# Altium PCB ECEN3730_brd2a_9-26-2024.PcbDoc
Units mil, origin at the board's own origin, x right, y up, seen from the top; angles counter-clockwise.
Board outline 3500 x 2000 mil, 2 copper layers (Top Layer, Bottom Layer), stack 61.756 mil thick; 22 components, 12 nets, 57 pads, 13 vias.
Unrouted connection lines stored in the file: 1.
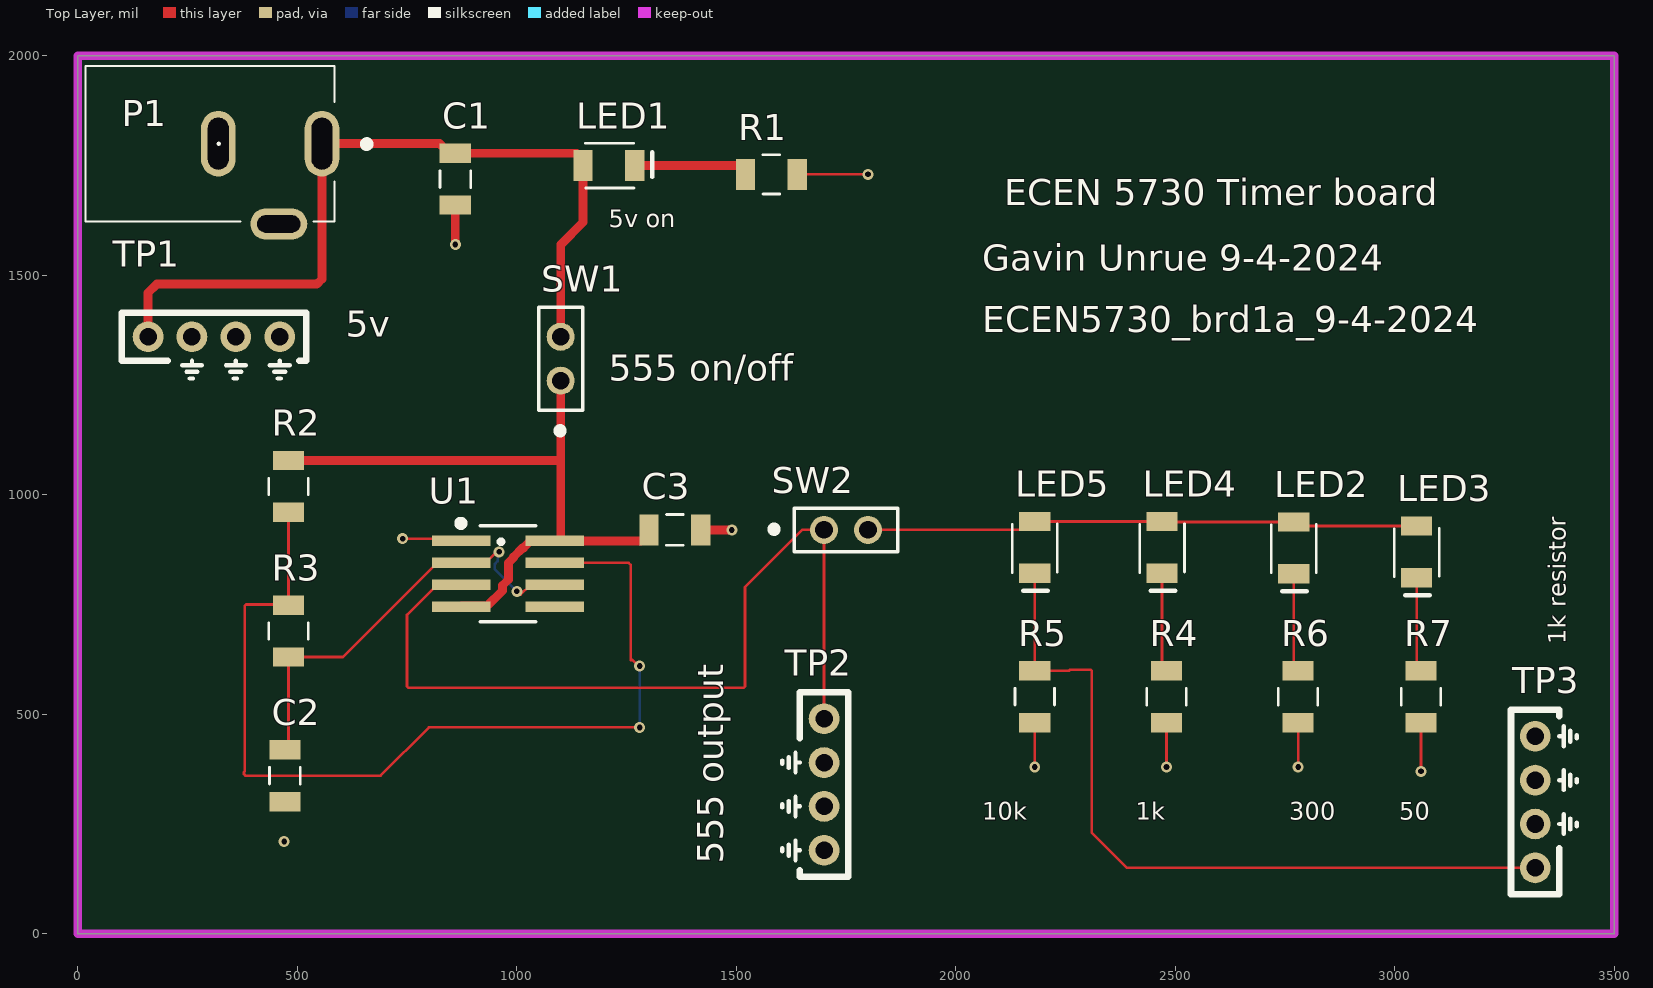
[diagram p0: Top Layer view]
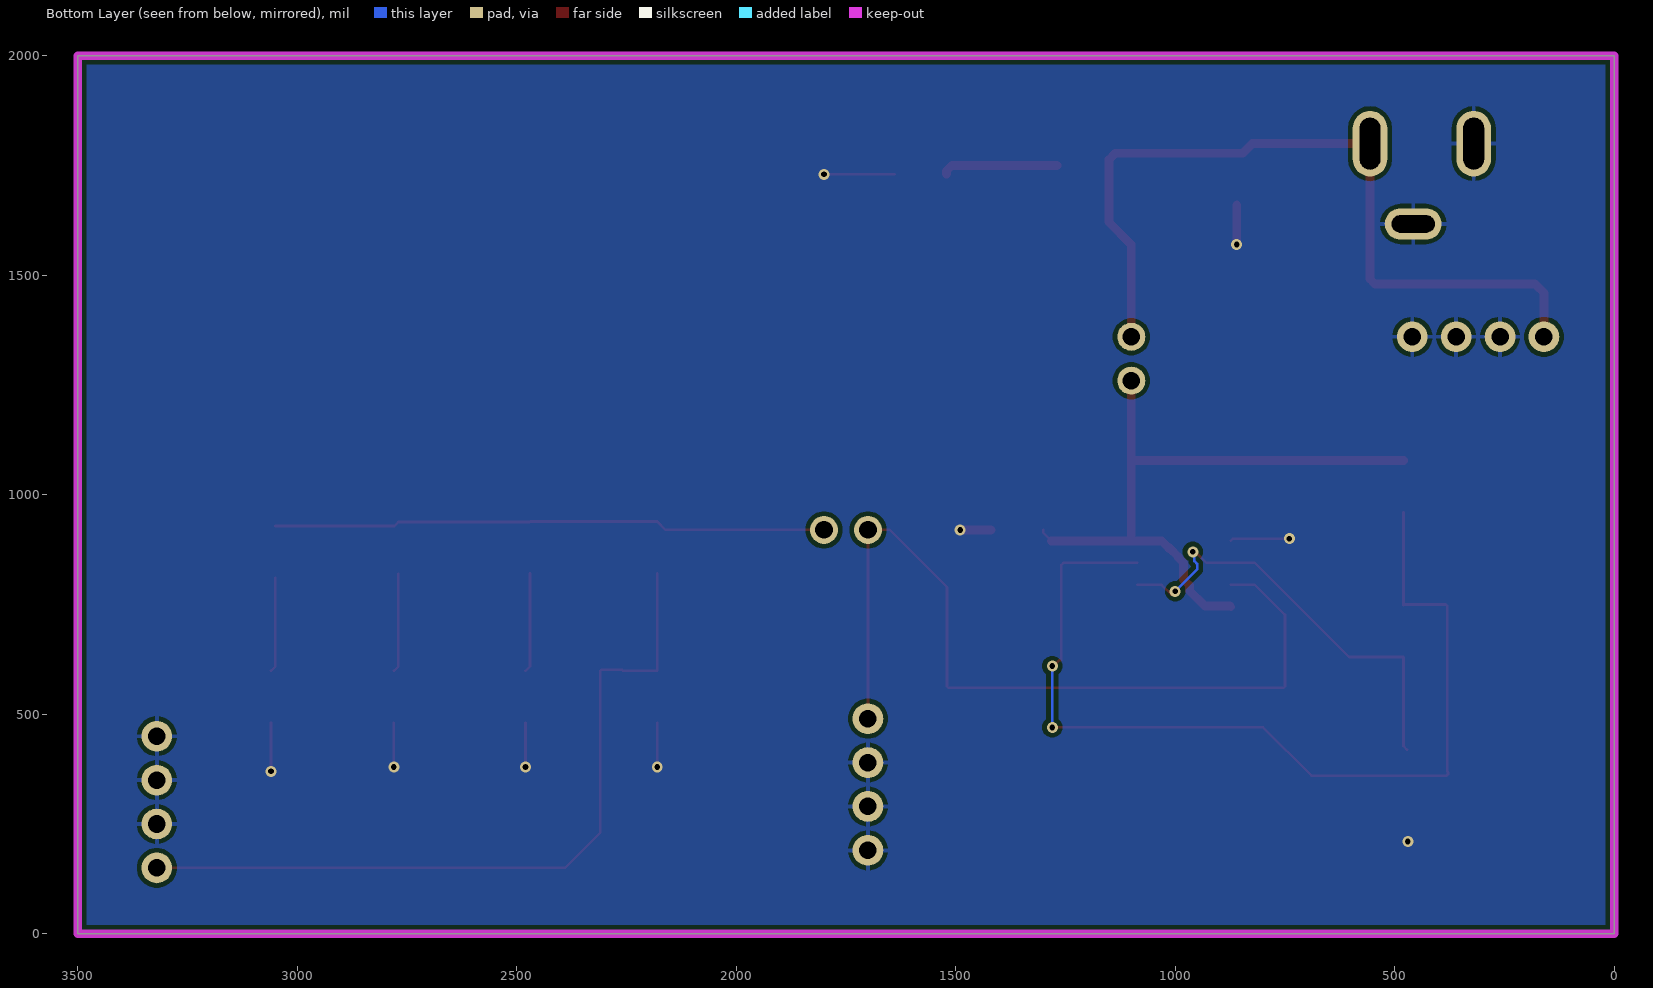
[diagram p1: Bottom Layer view, seen from below]
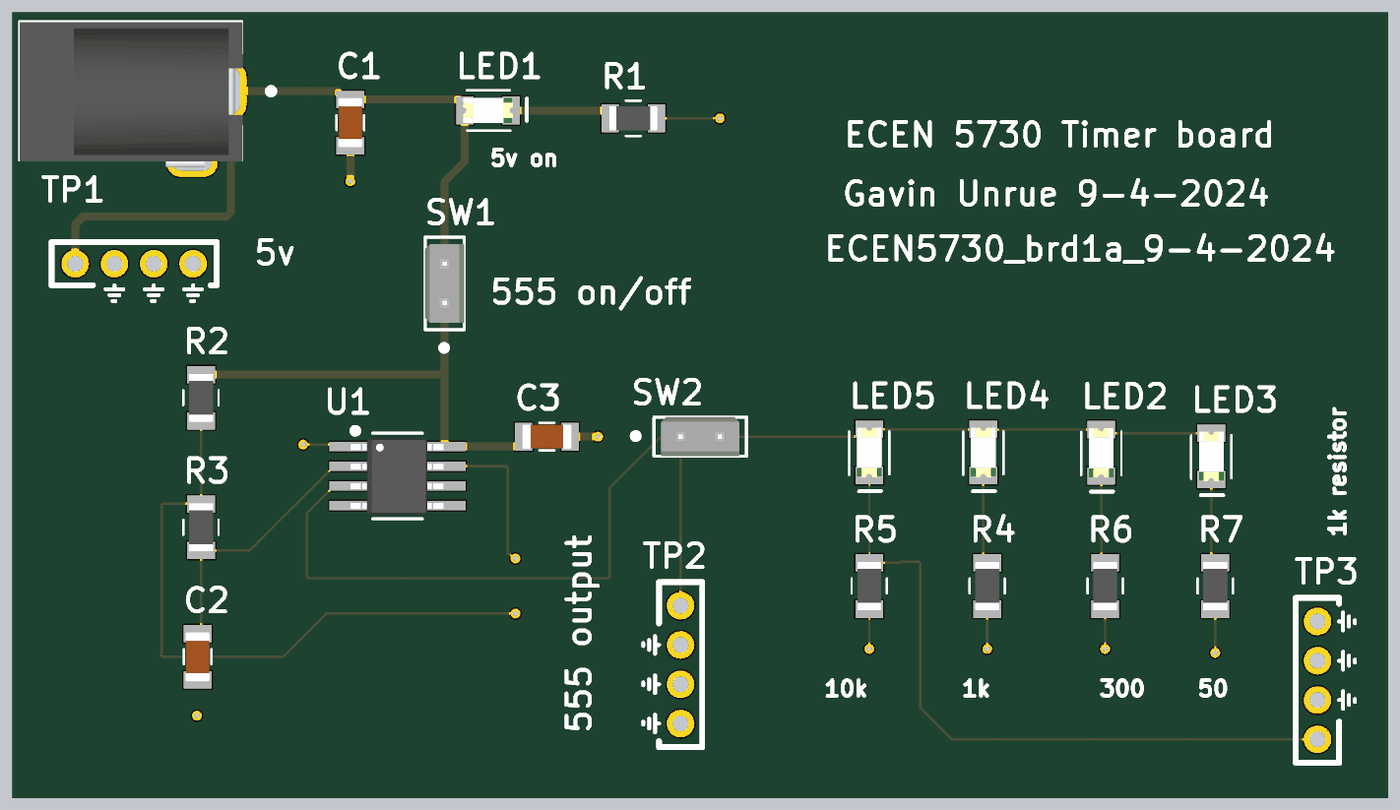
[diagram p2: 3D render of the assembled board from above, using the file's embedded part models]

## Layer stack, top to bottom
Top Solder: solder mask 1, SM-001, Dk 4
Top Layer: signal copper 1.378
Dielectric 1: core 59, Core-043, Dk 4.3
Bottom Layer: signal copper 1.378
Bottom Solder: solder mask 1, SM-001, Dk 4

## Board outline
0,0 3500,0 3500,2000 0,2000

## Design rules (kind name [scope] priority, off if disabled: settings)
BoardOutlineClearance [All] p1: gap=10 ignorepadtopadclearanceinfootprint=FALSE except(0: Arc-SplitContinuation Track-SplitContinuation SMDPad-SplitContinuation THPad-SplitContinuation Via-SplitContinuation Fill-SplitContinuation Poly-SplitContinuation Region-SplitContinuation Text-SplitContinuation)
Clearance clearance [All] p1: gap=10 ignorepadtopadclearanceinfootprint=FALSE
PlaneClearance [All] p1: clearance=10
PlaneConnect [All] p1: planeconnectstyle=Direct reliefexpansion=20 reliefentries=4 reliefconductorwidth=10 reliefairgap=10
PolygonConnect [All] p1: thpad.connectstyle=Relief thpad.reliefconductorwidth=10 thpad.reliefentries=4 thpad.polygonreliefangle="90 Angle" thpad.airgapwidth=10 smdpad.connectstyle=Direct smdpad.reliefconductorwidth=10 smdpad.reliefentries=4 smdpad.polygonreliefangle="90 Angle" smdpad.airgapwidth=10 via.connectstyle=Direct via.reliefconductorwidth=10 via.reliefentries=4 via.polygonreliefangle="90 Angle" via.airgapwidth=10
RoutingVias [All] p1: holewidth=13 width=25 viastyle="Through Hole" minholewidth=13 minwidth=25 maxholewidth=60 maxwidth=80
SolderMaskExpansion [All] p1: expansion=4 istentingtop=FALSE
UnRoutedNet [All] p1: checkbadconnections=TRUE
Width [All] p1: maxlimit=100 minlimit=6 preferedwidth=6 minimp=50.000000 maximp=50.000000 favimp=50.000000
27 further rules are at their usual default settings.

## Components (designator, comment, footprint, x,y, rotation, side; value= is the part's Value field where it differs from the comment)
C1 "22uF" 1206_Passive_Capacitor 860,1719 r90 top
C2 "1uF" 1206_Passive_Capacitor 471.62,360 r90 top
C3 "22uF" 1206_Passive_Capacitor 1360,920 r0 top
LED1 "Red" LED_1206 1210,1750 r0 top
LED2 "Red" LED_1206 2770,879 r270 top
LED3 "Red" LED_1206 3050,870 r270 top
LED4 "Red" LED_1206 2470,880 r270 top
LED5 "Red" LED_1206 2180,880 r270 top
P1 "Power Jack" Power_Jack 556.22,1800 r180 top value="CONN PWR JACK 2X5.5MM SOLDER"
R1 "1k" 1206_Passive_Resitor 1580,1730 r180 top value="1K Ohm"
R2 "1k" 1206_Passive_Resitor 480,1019 r90 top value="1K Ohm"
R3 "1k" 1206_Passive_Resitor 480,689.5 r90 top value="1K Ohm"
R4 "300 Ohm" 1206_Passive_Resitor 2480,540 r90 top value=300Ohm
R5 "1k" 1206_Passive_Resitor 2180,540 r90 top value="1K Ohm"
R6 "100M" 1206_Passive_Resitor 2780,540 r90 top value="50 Ohm"
R7 "" 1206_Passive_Resitor 3060,540 r90 top value="10K Ohm"
SW1 "555_off/on_switch" 2Pin-Header-Conn 1100,1260 r90 top
SW2 "led_on_off_sw" 2Pin-Header-Conn 1700,920 r0 top
TP1 "5v TP" TP10x_Probe 310,1360 r0 top
TP2 "555_out_tp" TP10x_Probe 1700,340 r270 top
TP3 "TP_led_current" TP10x_Probe 3320,300 r90 top
U1 "LMC555CMX/NOPB" TS555IDTTR 980,820 r0 top

## Footprints (in the part's own frame and the unit in brackets; to place one, negate y for a bottom-side part, rotate by r counter-clockwise, add the part's x,y. Pads: shape width x height; smd on the part's side, far side on the other; paste and mask are expansions set on the pad)
2Pin-Header-Conn [mm]
  round 1.62 hole 1.02: 1(0,0) 2(2.54,0)
  silkscreen extent -3.03,-1.27 4.26,1.26, body extent -1.27,-1.27 3.81,1.27, height 8.13
1206_Passive_Capacitor [mil]
  rect 44x71 smd: 1(-59,0) 2(59,0)
  silkscreen extent -19,-35 19,35, body extent -63,-31 63,32, height 50
1206_Passive_Resitor [mil]
  rect 44x71 smd: 1(-59,0) 2(59,0)
  silkscreen extent -19,-45 19,45, body extent -61,-31 61,31, height 26
LED_1206 [mil]
  rect 44x71 smd: 1(-59,0) 2(59,0)
  silkscreen extent -54,-51 99,51, body extent -63,-31 63,31, height 28
Power_Jack [mm]
  oval 2x3.8 hole 1.2 slot 3 at 90 deg: 1(0,0) 2(6,0)
  oval 3.3x1.8 hole 1 slot 2.5 at 0 deg: 3(2.5,4.65)
  silkscreen extent -2.79,-4.5 13.68,4.5, body extent -0.76,-4.45 13.64,4.95, height 11.49
TP10x_Probe [mil] "Small Probs footprint"
  round 70 hole 40: 1(-150,0) 2(-50,0) 2(50,0) 2(150,0)
  silkscreen extent -210,-95 210,55
TS555IDTTR [mm] "IC OSC Single Timer 2.7MHz 8SOIC"
  rect 3.4x0.6 smd: 1(-2.7,1.905) 2(-2.7,0.635) 3(-2.7,-0.635) 4(-2.7,-1.905) 5(2.7,-1.905) 6(2.7,-0.635) 7(2.7,0.635) 8(2.7,1.905)
  silkscreen extent -2.85,-2.77 1.6,3.05, body extent -3.03,-2.48 2.96,2.43, height 1.75

## Part data
C1 C3: library part C_22uF_1206, "22uF ±10% 25V X5R 1206 Multilayer Ceramic Capacitors MLCC - SMD/SMT RoHS", LCSC Part#=C12891, MFR Part #=CL31A226KAHNNNE, Datasheet=https://datasheet.lcsc.com/lcsc/1811031514_Samsung-Electro-Mechanics-CL31A226KAHNNNE_C12891.pdf, Type=basic
C2: library part C_1uF_1206, "MULTILAYER CERAMIC CAPACITORS MLCC - SMD/SMT 1UF 50V 1206 ROHS", LCSC Part#=C1848, MFR Part #=CL31B105KBHNNNE, Digikey Link=https://www.digikey.com/product-detail/en/C1206C105M4RACTU/399-8150-1-ND/3471873/?itemSeq=304982366, Type=Basic
LED1 LED2 LED3 LED4 LED5: library part LED_RED_1206, "Red 621~631nm 1206 Light Emitting Diodes (LED) RoHS", LCSC Part#=C93133, MFR Part #=15-21/R6C-FQ1R1B/2T, Datasheet=https://datasheet.lcsc.com/szlcsc/1811151241_Everlight-Elec-15-21-R6C-FQ1R1B-2T_C93133.pdf, Type=Extended
P1: library part "P_Power Jack", "Power Barrel Connector Jack 2.10mm ID (0.083\"), 5.50mm OD (0.217\") Through Hole, Right Angle", LCSC Part#=C136744, MFR Part #=PJ-102A, Digikey Link=https://www.digikey.com/product-detail/en/PJ-102A/CP-102A-ND/275425/?itemSeq=304982367, Type=Extended
R1 R2 R3 R5: library part R_1K_1206, "CHIP RESISTOR - SURFACE MOUNT 1KOHMS ±1% 1/4W 1206 ROHS", LCSC Part#=C4410, MFR Part #=RNCP1206FTD1K00CT, Digikey Link=https://www.digikey.com/product-detail/en/RNCP1206FTD1K00/RNCP1206FTD1K00CT-ND/2240675/?itemSeq=304982373, Type=Basic
R4: library part R_300Ohm_1206, "CHIP RESISTOR - SURFACE MOUNT 300OHMS ±1% 1/4W 1206 ROHS", LCSC Part#=C17887, MFR Part #=1206W4F3000T5E, Datasheet=https://datasheet.lcsc.com/szlcsc/Uniroyal-Elec-1206W4F3000T5E_C17887.pdf, Type=Basic
R6 R7: library part R_100M_1206_1, "CHIP RESISTOR - SURFACE MOUNT 100MOHMS ±1% 1/4W 1206 ROHS", LCSC Part#=C59781, MFR Part #=1206W4F1006T5E, Digikey Link=https://www.digikey.com/en/products/detail/stackpole-electronics-inc/HMC1206JT100M/1742855, Type="Extended part"
SW1 SW2: library part SW_2Pin_100mil_Switch, "2Pin Header", LCSC Part#=C124375, Type=Extended
TP1 TP2 TP3: library part TP_10x_Probe, "Test Point 300 mil centers"
U1: library part U_555_Fast, "555 Type, Timer/Oscillator _Single_ IC 3MHz 8-SO", LCSC Part#=C90760, Package=SOIC-8, Digikey Link=https://www.digikey.com/product-detail/en/texas-instruments/LMC555CMX-NOPB/LMC555CMX-NOPBCT-ND/1010550, MFR Part #=LMC555CMX/NOPB, Type=Extended

## Via types
v1: diameter 25, hole 13, Top Layer to Bottom Layer, 13 vias

## Nets (pads, with @x,y where several pads share a name; then routed paths per layer and width w, separated by ;. In a path a pad name is that pad's centre, name@x,y a point inside that pad or via, vN(x,y) a via of type N, cw(c..) or ccw(c..) an arc to the next point about the centre after c; other vN are vias at no path point)
555_5v: C3.1 R2.2 SW1.1 U1.4 U1.8 | length 1519.4
  Top Layer w6: C3.1@1282,895 1301,914 C3.1
  Top Layer w20: R2.2 1099.59,1078 1100,1078.41 ; U1.4 875.51,746.81 932.54,746.81 967.5,781.77 967.5,793.46 981.12,807.08 981.12,845.16 992.5,856.54 992.5,858.23 1013.32,879.05 1015.23,879.05 1031.18,895 U1.8 U1.8@1098.19,895 ; SW1.1 1100,1078.41 ; C3.1@1282,895 U1.8@1098.19,895 ; U1.8@1098.19,895 1100,896.81 1100,1078.41
555_D: R2.1 R3.2 U1.7 | length 2203.6
  Top Layer w6: R2.1 R3.2 478.5,750 383.51,750 380,746.49 380,370 378.49,368.49 378.49,363.51 382,360 690,360 800,470 v1(1280,470) ; U1.7 1255,845 1260,840 1260,623.51 1263.11,623.51 1276.62,610 v1(1280,610)
  Bottom Layer w6: v1(1280,470) v1(1280,610)
555_output: SW2.1 TP2.1 U1.3 | length 1978.3
  Top Layer w6: U1.3 818.58,795 750,726.42 750,563.51 753.51,560 1516.49,560 1520,563.51 1520,790 1650,920 SW2.1 TP2.1
+5: C1.2 LED1.1 P1.1 SW1.2 TP1.1 | length 1852.2
  Top Layer w20: TP1.1 160,1460 180,1480 544.5,1480 556.22,1491.72 P1.1 824.5,1800 846.5,1778 C1.2 1136.5,1778 1151,1763.5 LED1.1 1151,1621 1100,1570 SW1.2
GND: C1.1 C2.1 C3.2 P1.2 P1.3 R1.1 R4.1 R5.1 R6.1 R7.1 TP1.2 TP2.2 TP3.2 U1.1 | length 871.8
  Top Layer w6: v1(740,900) 868.7,900 U1.1 ; R1.1 v1(1800,1730) ; v1(2180,380) R5.1 ; v1(2480,380) R4.1 ; v1(2780,380) R6.1 ; v1(3060,370) R7.1
  Top Layer w20: v1(860,1570) C1.1 ; C3.2 v1(1490,920)
  other v1: 470,210
NetC2_2: C2.2 R3.1 U1.2 U1.6 | length 1007.9
  Top Layer w6: C2.2 480,427.38 R3.1 604.08,630.5 818.58,845 U1.2 928.82,845 950.18,866.36 956.36,866.36 v1(960,870) ; v1(1000,780) 1000.79,780 1008.49,772.3 1031.18,795 U1.6
  Bottom Layer w6: v1(960,870) 956.36,866.36 956.36,848.79 950,842.43 950,830 v1(1000,780)
NetLED1_2: LED1.2 R1.2 | length 265
  Top Layer w20: LED1.2 1509,1750 1521,1738 R1.2
NetLED2_1: LED2.1 LED3.1 LED4.1 LED5.1 SW2.2 | length 1262
  Top Layer w6: SW2.2 2161,920 LED5.1 LED4.1 2471,938 LED2.1 2779,929 LED3.1
NetLED2_2: LED2.2 R6.2 | length 225.1
  Top Layer w6: LED2.2 2770,609 R6.2
NetLED3_2: LED3.2 R7.2 | length 216.1
  Top Layer w6: LED3.2 3050,609 R7.2
NetLED4_2: LED4.2 R4.2 | length 226.1
  Top Layer w6: LED4.2 2470,609 R4.2
NetLED5_2: LED5.2 R5.2 TP3.1 | length 1779.8
  Top Layer w6: LED5.2 R5.2 2258.24,599 2260.75,601.51 2306.49,601.51 2310,598 2310,230 2390,150 TP3.1 TP3.1@3310,160
pads on no net: U1.5

## Polygon pours and split planes (outlines as drawn)
GND on Bottom Layer "GND_L02_P000" (solid, pour order 0): 0,2000 3500,2000 3500,0 0,0

## Keep-outs
Keep-Out Layer:
  the board outline again, w20

## Silkscreen, mask and mechanical layers (free items; w line width, h text height)
Top Overlay:
  text "ECEN 5730 Timer board" at 2110,1660 h60
  text "5v on" at 1210,1610 h40
  text "Gavin Unrue 9-4-2024" at 2060,1510 h60
  text "ECEN5730_brd1a_9-4-2024" at 2060,1370 h60
  text "5v" at 610,1360 h60
  text "555 on/off" at 1210,1260 h60
  text "1k resistor" at 3390,660 h40 r90
  text "10k" at 2060,260 h40
  text "1k" at 2410,260 h40
  text "300" at 2760,260 h40
  text "50" at 3010,260 h40
  text "555 output" at 1470.01,160 h60 r90
Mechanical 1:
  the board outline again, w20